# Altium PCB PCB.PcbDoc
Units mm, origin at the board's own origin, x right, y up, seen from the top; angles counter-clockwise.
Board outline 99.8 x 34.3 mm, 2 copper layers (Top Layer, Bottom Layer), stack 1.571 mm thick; 57 components, 80 nets, 265 pads, 69 vias.
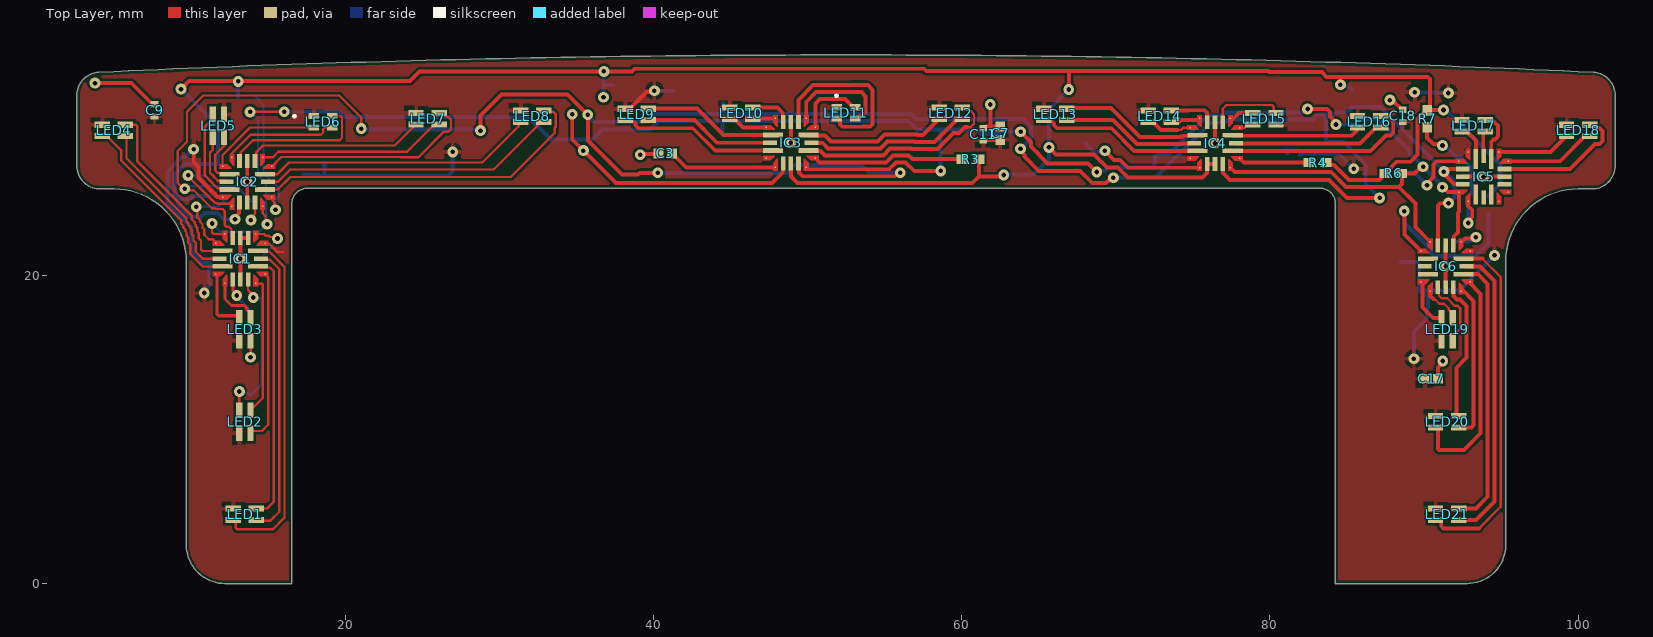
[diagram p0: Top Layer view]
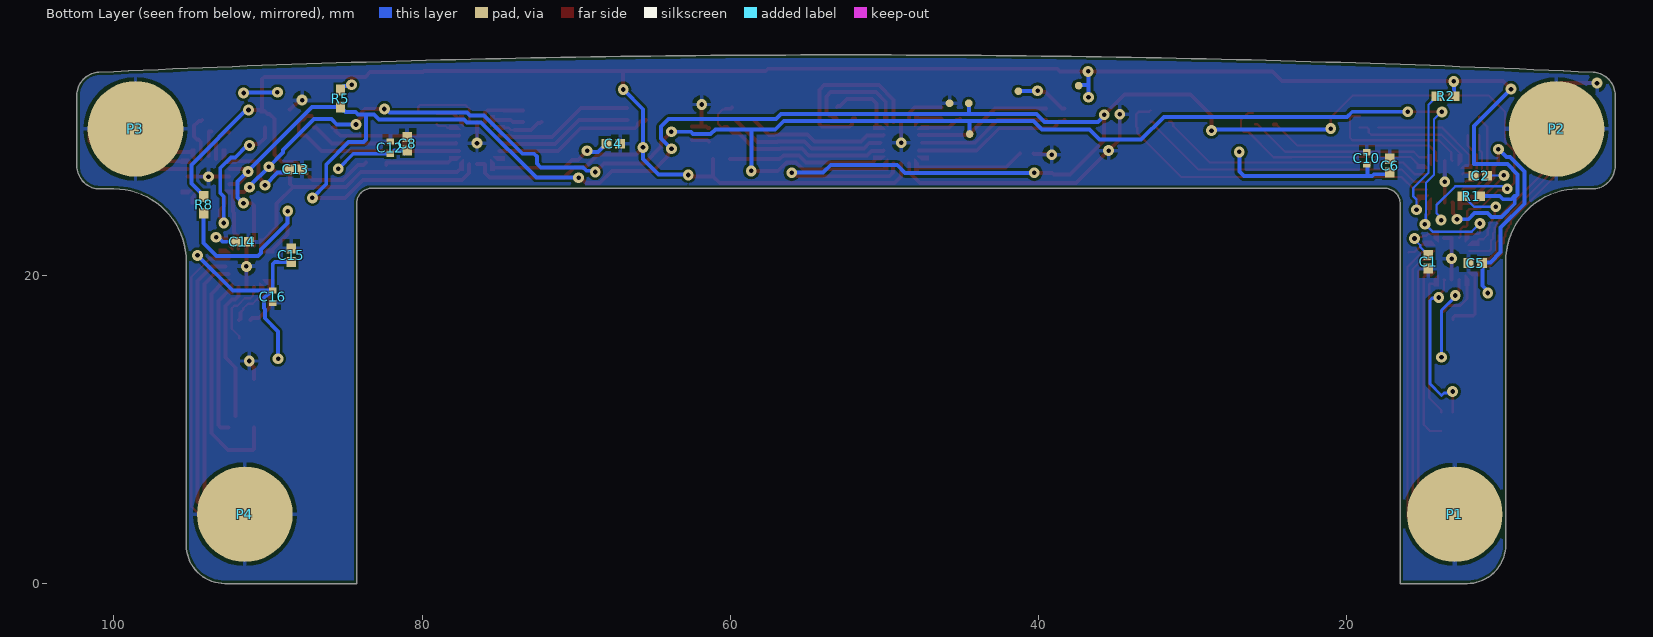
[diagram p1: Bottom Layer view, seen from below]
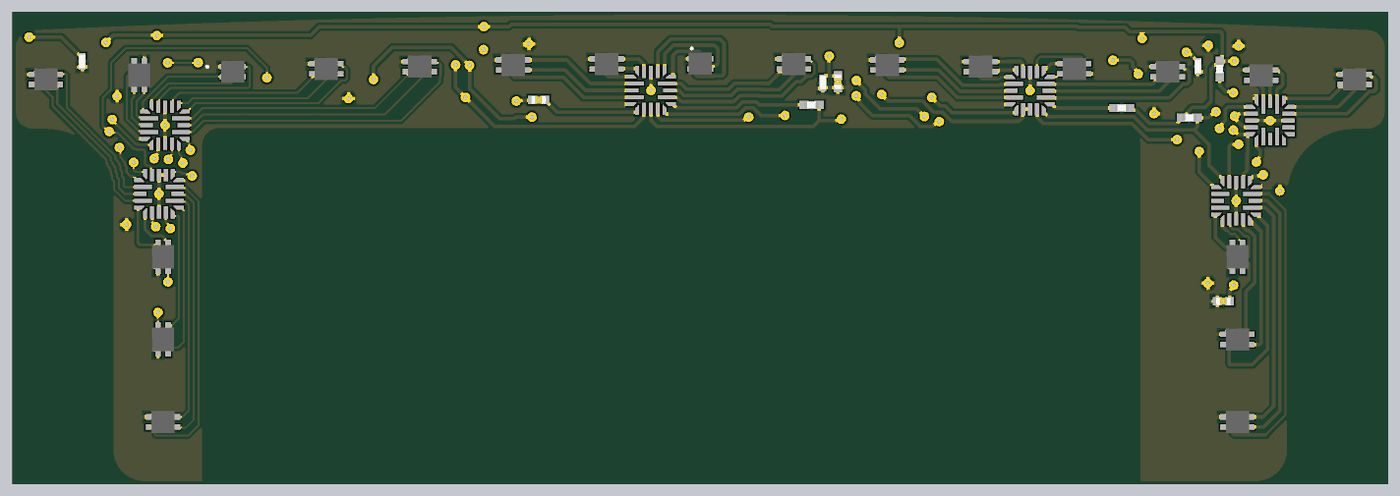
[diagram p2: 3D render of the assembled board from above, using the file's embedded part models]
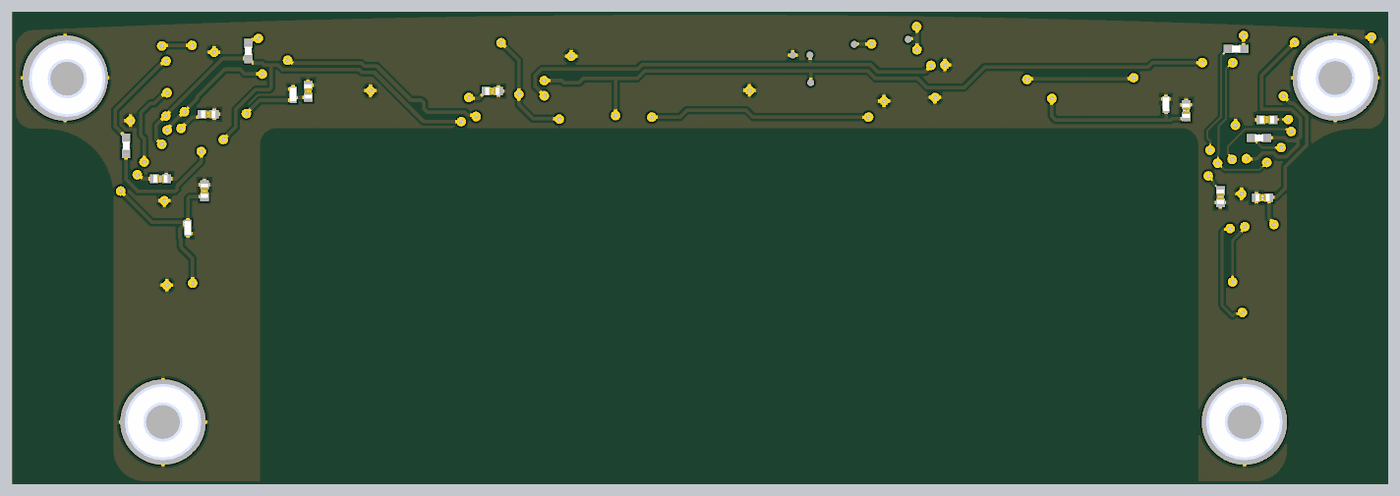
[diagram p3: 3D render of the assembled board from below, using the file's embedded part models]

## Layer stack, top to bottom
Top Solder: solder mask 0.0102, Solder Resist, Dk 3.5
Top Layer: signal copper 0.0356
Dielectric 1: dielectric 1.5, FR-4, Dk 4.8
Bottom Layer: signal copper 0.0356
Bottom Solder: solder mask 0.0102, Solder Resist, Dk 3.5

## Board outline
4.1,25.602 cw(c4.1,27.102) 2.6,27.102 2.6,31.68 cw(c4.1,31.68) 4.03,33.178 4.989,33.222 5.948,33.266 6.908,33.308 7.869,33.35 8.83,33.391 9.792,33.431 10.754,33.47 11.717,33.508 12.68,33.545 13.644,33.581 14.609,33.617 15.574,33.651 16.539,33.685 17.505,33.718 18.472,33.75 19.439,33.781 20.406,33.811 21.374,33.84 22.343,33.868 23.311,33.896 24.281,33.922 25.25,33.948 26.22,33.972 27.19,33.996 28.161,34.019 29.132,34.041 30.103,34.062 31.075,34.083 32.047,34.102 33.019,34.12 33.991,34.138 34.964,34.155 35.937,34.17 36.91,34.185 37.883,34.199 38.857,34.212 39.831,34.224 40.805,34.236 41.779,34.246 42.753,34.255 43.727,34.264 44.702,34.272 45.676,34.278 46.651,34.284 47.626,34.289 48.601,34.293 49.575,34.296 50.55,34.299 51.525,34.3 52.5,34.3 53.475,34.3 54.45,34.299 55.425,34.296 56.4,34.293 57.375,34.289 58.35,34.284 59.324,34.278 60.299,34.272 61.273,34.264 62.248,34.255 63.222,34.246 64.196,34.236 65.17,34.224 66.144,34.212 67.117,34.199 68.091,34.185 69.064,34.17 70.037,34.155 71.01,34.138 71.982,34.12 72.954,34.102 73.926,34.083 74.898,34.062 75.869,34.041 76.84,34.019 77.81,33.996 78.781,33.972 79.751,33.948 80.72,33.922 81.689,33.896 82.658,33.868 83.626,33.84 84.594,33.811 85.562,33.781 86.529,33.75 87.495,33.718 88.461,33.685 89.427,33.651 90.392,33.617 91.356,33.581 92.321,33.545 93.284,33.508 94.247,33.47 95.209,33.431 96.171,33.391 97.132,33.35 98.093,33.308 99.052,33.266 100.012,33.222 100.97,33.178 cw(c100.9,31.68) 102.4,31.68 102.4,27.102 cw(c100.9,27.102) 100.9,25.602 100,25.602 ccw(c100,20.902) 95.3,20.902 95.3,2.5 cw(c92.8,2.5) 92.8,0 84.25,0 84.25,24.65 ccw(c83.25,24.65) 83.25,25.65 17.55,25.65 ccw(c17.55,24.65) 16.55,24.65 16.55,0 12.2,0 cw(c12.2,2.5) 9.7,2.5 9.7,20.902 ccw(c5,20.902) 5,25.602

## Design rules (kind name [scope] priority, off if disabled: settings)
BoardOutlineClearance [All] p1: gap=0.2 ignorepadtopadclearanceinfootprint=FALSE
Clearance [All] p1: gap=0.173 ignorepadtopadclearanceinfootprint=TRUE
MinimumSolderMaskSliver [All] p1: minsoldermaskwidth=0.1
PolygonConnect [All] p1: connectstyle=Relief reliefconductorwidth=0.254 reliefentries=4 polygonreliefangle="90 Angle" airgapwidth=0.254
RoutingVias [All] p1: holewidth=0.711 width=1.27 viastyle="Through Hole" minholewidth=0 minwidth=0 maxholewidth=0.711 maxwidth=1.27
SolderMaskExpansion [All] p1: expansion=0.102 istentingtop=FALSE
Width [All] p1: maxlimit=0.254 minlimit=0.15 preferedwidth=0.254
29 further rules are at their usual default settings.

## Classes and differential pairs
component class "Raspberry Pi inputs": P1 P2 P3 P4
component class LEDs_Sheet_2: C13 C14 C15 C16 C17 C18 IC6 LED17 LED18 LED19 LED20 LED21 R7 R8
component class LEDs_Sheet_1: C1 C2 C3 C4 C5 C6 C7 C8 C9 C10 C11 C12 IC1 IC2 IC3 IC4 LED1 LED2 LED3 LED4 LED5 LED6 LED7 LED8 LED9 LED10 LED11 LED12 LED13 LED14 LED15 LED16 R1 R2 R3 R4 R5 R6

## Components (designator, comment, footprint, x,y, rotation, side; value= is the part's Value field where it differs from the comment)
C1 "C0402C105K9PAC" CAPC1005X55N 14.733,20.875 r270 bottom
C2 "C0402C105K9PAC" CAPC1005X55N 11.362,26.465 r0 bottom
C3 "C0402C105K9PAC" CAPC1005X55N 40.773,27.905 r180 top
C4 "C0402C105K9PAC" CAPC1005X55N 67.59,28.549 r180 bottom
C5 "C0402C105K9PAC" CAPC1005X55N 11.683,20.798 r180 bottom
C6 "C0402C105K9PAC" CAPC1005X55N 17.226,27.122 r270 bottom
C7 "C0402C105K9PAC" CAPC1005X55N 62.499,29.227 r270 top
C8 "C0402C105K9PAC" CAPC1005X55N 80.96,28.53 r270 bottom
C9 "C1005X7S1A225K050BC" C1005_Commercial 7.636,30.699 r270 top
C10 "C1005X7S1A225K050BC" C1005_Commercial 18.706,27.582 r270 bottom
C11 "C1005X7S1A225K050BC" C1005_Commercial 61.397,29.145 r270 top
C12 "C1005X7S1A225K050BC" C1005_Commercial 82.062,28.288 r270 bottom
C13 "C0402C105K9PAC" CAPC1005X55N 88.212,26.865 r180 bottom
C14 "C0402C105K9PAC" CAPC1005X55N 91.683,22.177 r180 bottom
C15 "C0402C105K9PAC" CAPC1005X55N 88.492,21.305 r270 bottom
C16 "C1005X7S1A225K050BC" C1005_Commercial 89.694,18.608 r90 bottom
C17 "C0402C105K9PAC" CAPC1005X55N 90.482,13.281 r180 top
C18 "C1005X7S1A225K050BC" C1005_Commercial 88.619,30.347 r270 top
IC1 "LED1202JR" "QFN20 3x3 (0,5mm pitch)" 13.206,21.082 r0 top
IC2 "LED1202JR" "QFN20 3x3 (0,5mm pitch)" 13.654,26.066 r180 top
IC3 "LED1202JR" "QFN20 3x3 (0,5mm pitch)" 48.919,28.6 r180 top
IC4 "LED1202JR" "QFN20 3x3 (0,5mm pitch)" 76.442,28.58 r180 top
IC5 "LED1202JR" "QFN20 3x3 (0,5mm pitch)" 93.866,26.401 r90 top
IC6 "LED1202JR" "QFN20 3x3 (0,5mm pitch)" 91.404,20.578 r0 top
LED1 "150161M153130" 150161M153130#1 13.5,4.5 r0 top
LED2 "150161M153130" 150161M153130#1 13.5,10.5 r90 top
LED3 "150161M153130" 150161M153130#1 13.5,16.5 r90 top
LED4 "150161M153130" 150161M153130#1 5,29.402 r0 top
LED5 "150161M153130" 150161M153130#1 11.782,29.702 r270 top
LED6 "150161M153130" 150161M153130#2 18.565,29.956 r0 top
LED7 "150161M153130" 150161M153130#1 25.35,30.164 r0 top
LED8 "150161M153130" 150161M153130#1 32.137,30.326 r0 top
LED9 "150161M153130" 150161M153130#1 38.924,30.441 r0 top
LED10 "150161M153130" 150161M153130#1 45.712,30.511 r0 top
LED11 "150161M153130" 150161M153130#2 52.5,30.534 r0 top
LED12 "150161M153130" 150161M153130#1 59.288,30.511 r0 top
LED13 "150161M153130" 150161M153130#1 66.076,30.441 r0 top
LED14 "150161M153130" 150161M153130#1 72.863,30.326 r0 top
LED15 "150161M153130" 150161M153130#1 79.65,30.164 r180 top
LED16 "150161M153130" 150161M153130#1 86.435,29.956 r0 top
LED17 "150161M153130" 150161M153130#1 93.218,29.702 r0 top
LED18 "150161M153130" 150161M153130#1 100,29.402 r0 top
LED19 "150161M153130" 150161M153130#1 91.5,16.5 r90 top
LED20 "150161M153130" 150161M153130#1 91.5,10.5 r0 top
LED21 "150161M153130" 150161M153130#1 91.5,4.5 r0 top
P1 "SMTSOB-M3-6ET" SMTSOB-M3-6ET#1 13,4.5 r90 bottom
P2 "SMTSOB-M3-6ET" SMTSOB-M3-6ET#1 6.4,29.5 r90 bottom
P3 "SMTSOB-M3-6ET" SMTSOB-M3-6ET#2 98.451,29.449 r90 bottom
P4 "SMTSOB-M3-6ET" SMTSOB-M3-6ET#1 91.5,4.5 r90 bottom
R1 "MCS04020D1001BE000" RESC1005X37N 11.937,25.137 r180 bottom
R2 "MCS04020D1001BE000" RESC1005X37N 13.602,31.614 r180 bottom
R3 "MCS04020D1001BE000" RESC1005X37N 60.574,27.538 r0 top
R4 "MCS04020D1001BE000" RESC1005X37N 83.094,27.318 r0 top
R5 "MCS04020D1001BE000" RESC1005X37N 85.304,31.469 r90 bottom
R6 "MCS04020D1001BE000" RESC1005X37N 88.011,26.609 r180 top
R7 "MCS04020D1001BE000" RESC1005X37N 90.209,30.152 r90 top
R8 "MCS04020D1001BE000" RESC1005X37N 94.178,24.572 r90 bottom

## Footprints (in the part's own frame and the unit in brackets; to place one, negate y for a bottom-side part, rotate by r counter-clockwise, add the part's x,y. Pads: shape width x height; smd on the part's side, far side on the other; paste and mask are expansions set on the pad)
150161M153130#1 [mm]
  rect 1x0.4 smd: 1(-0.75,0.37) 2(-0.75,-0.37) 3(0.75,-0.37) 4(0.75,0.37)
  body extent -0.85,-0.8 0.85,0.8, height 1.8
150161M153130#2 [mm]
  rect 0.7x0.4 smd: 1(-0.6,0.37) 2(-0.6,-0.37) 3(0.6,-0.37) 4(0.6,0.37)
  silkscreen extent -1.9,0.32 -1.8,0.42, body extent -0.85,-0.8 0.85,0.8, height 1.8
C1005_Commercial [mm]
  rect 0.4x0.5 smd: 1(-0.4,0) 2(0.4,0)
  body extent -0.51,-0.25 0.49,0.25, height 0.25
CAPC1005X55N [mm]
  rect 0.65x0.62 smd: 1(-0.44,0) 2(0.44,0)
  body extent -0.52,-0.28 0.53,0.27, height 0.55
"QFN20 3x3 (0,5mm pitch)" [mm]
  round 0.1 smd: 1(-1.6,1) 5(-1.6,-1) 6(-1,-1.6) 10(1,-1.6) 11(1.6,-1) 15(1.6,1) 16(1,1.6) 20(-1,1.6)
  rect 1.3x0.3 smd: 2(-1.15,0.5) 4(-1.15,-0.5) 12(1.15,-0.5) 14(1.15,0.5)
  rect 0.9x0.3 smd: 3(-1.35,0) 13(1.35,0)
  rect 0.3x0.9 smd: 7(-0.5,-1.35) 8(0,-1.35) 9(0.5,-1.35) 17(0.5,1.35) 18(0,1.35) 19(-0.5,1.35)
  Top Layer region: 1.15,-1.8 1.15,-1.29 0.91,-1.05 0.85,-1.05 0.85,-1.8
  Top Layer region: 1.8,-1.15 1.29,-1.15 1.05,-0.91 1.05,-0.85 1.8,-0.85
  Top Layer region: 1.8,1.15 1.29,1.15 1.05,0.91 1.05,0.85 1.8,0.85
  Top Layer region: 1.15,1.8 1.15,1.29 0.91,1.05 0.85,1.05 0.85,1.8
  Top Layer region: -1.15,1.8 -1.15,1.29 -0.91,1.05 -0.85,1.05 -0.85,1.8
  Top Layer region: -1.8,1.15 -1.29,1.15 -1.05,0.91 -1.05,0.85 -1.8,0.85
  Top Layer region: -1.8,-1.15 -1.29,-1.15 -1.05,-0.91 -1.05,-0.85 -1.8,-0.85
  Top Layer region: -1.15,-1.8 -1.15,-1.29 -0.91,-1.05 -0.85,-1.05 -0.85,-1.8
  body extent -1.5,-1.5 1.5,1.5, height 0.55
RESC1005X37N [mm]
  rect 0.7x0.6 smd: 1(-0.55,0) 2(0.55,0)
  body extent -0.5,-0.25 0.5,0.25, height 0.32
SMTSOB-M3-6ET#1 [mm] "Distance M3"
  round 6.2 smd: 1(0,0)
  body extent -2.78,-2.78 2.78,2.78, height 6
SMTSOB-M3-6ET#2 [mm] "Distance M3"
  round 6.2 smd: 1(0.051,0.149)
  body extent -2.78,-2.78 2.78,2.78, height 6

## Part data
C1 C2 C3 C4 C5 C6 C7 C8 C13 C14 C15 C17: "Capacitor", Manufacturer_Name=KEMET, Mouser Part Number=80-C0402C105K9PAC, Arrow Part Number=C0402C105K9PAC, Arrow Price/Stock=https://www.arrow.com/en/products/c0402c105k9pac/kemet-corporation?region=nac, Datasheet Link=https://content.kemet.com/datasheets/KEM_C1002_X7R_SMD.pdf, Height=0.55mm, Manufacturer_Part_Number=C0402C105K9PAC, Mouser Price/Stock=https://www.mouser.co.uk/ProductDetail/KEMET/C0402C105K9PAC?qs=AHS6Mz2dKxPyNrxaU50ZkQ%3D%3D
C9 C10 C11 C12 C16 C18: "2µ2F 0402", Manufacturer_Name=TDK, Mouser Part Number=810-C1005X7S1A225K, Arrow Part Number=C1005X7S1A225K050BC, Arrow Price/Stock=https://www.arrow.com/en/products/c1005x7s1a225k050bc/tdk?region=nac, Datasheet Link=https://product.tdk.com/system/files/dam/doc/product/capacitor/ceramic/mlcc/catalog/mlcc_commercial_general_en.pdf, Height=0.55mm, Manufacturer_Part_Number=C1005X7S1A225K050BC, Mouser Price/Stock=https://www.mouser.co.uk/ProductDetail/TDK/C1005X7S1A225K050BC?qs=dfay7wIA1uFANmjMJAzwOA%3D%3D
IC1 IC2 IC3 IC4 IC5 IC6: "Integrated Circuit", Manufacturer_Name=STMicroelectronics, Mouser Part Number=511-LED1202JR, Arrow Part Number=LED1202JR, Arrow Price/Stock=https://www.arrow.com/en/products/led1202jr/stmicroelectronics?region=nac, Datasheet Link=https://componentsearchengine.com/Datasheets/1/LED1202JR.pdf, Height=0.653mm, Manufacturer_Part_Number=LED1202JR, Mouser Price/Stock=https://www.mouser.co.uk/ProductDetail/STMicroelectronics/LED1202JR?qs=P19jvy6W2mcPsIm9dkDZbQ%3D%3D
LED1 LED2 LED3 LED4 LED5 LED6 LED7 LED8 LED9 LED10 LED11 LED12 LED13 LED14 LED15 LED16 LED17 LED18 LED19 LED20 LED21: "LED", Manufacturer_Name="Wurth Elektronik", Mouser Part Number=710-150161M153130, Datasheet Link=https://www.mouser.co.uk/datasheet/2/445/150161M153130-1838821.pdf, Height=1.7mm, Manufacturer_Part_Number=150161M153130, Mouser Price/Stock=https://www.mouser.co.uk/ProductDetail/Wurth-Elektronik/150161M153130?qs=GedFDFLaBXEcD4evLrps3w%3D%3D
P1 P2 P3 P4: "Spacer 8mm"
R1 R2 R3 R4 R5 R6 R7 R8: "Resistor 1k 0402", Manufacturer_Name=Vishay, Mouser Part Number=594-MCS04020D1001BE0, Datasheet Link=http://www.vishay.com/docs/28705/mcx0x0xpro.pdf, Height=0.37mm, Manufacturer_Part_Number=MCS04020D1001BE000, Mouser Price/Stock=https://www.mouser.co.uk/ProductDetail/Vishay-Beyschlag/MCS04020D1001BE000?qs=H5EaGE3Pc5m43MFwYZQH1Q%3D%3D

## Free pads (board coordinates)
  round 0.5 smd far side: 2(44.477,29.164) 3(44.539,31.165) 4(45.782,31.165) 5(37.407,32.306) 6(41.317,31.948)

## Via types
v1: diameter 0.7, hole 0.3, Top Layer to Bottom Layer, 69 vias

## Nets (pads, with @x,y where several pads share a name; then routed paths per layer and width w, separated by ;. In a path a pad name is that pad's centre, name@x,y a point inside that pad or via, vN(x,y) a via of type N, cw(c..) or ccw(c..) an arc to the next point about the centre after c; other vN are vias at no path point)
1B: IC1.12 LED1.4 | length 17.6
  Top Layer w0.15: LED1.4@14.1,4.87 14.935,4.87 15.381,5.316 15.381,20.259 15.133,20.507 14.431,20.507 IC1.12
1G: IC1.13 LED1.3 | length 19.1
  Top Layer w0.15: LED1.3@14.1,4.13 14.145,4.085 15.156,4.085 15.728,4.657 15.728,20.403 15.124,21.007 14.631,21.007 IC1.13
1R: IC1.14 LED1.2 | length 22.5
  Top Layer w0.15: LED1.2@12.9,4.13 12.9,3.611 12.988,3.523 15.32,3.523 16.075,4.279 16.075,20.546 15.293,21.329 15.116,21.507 14.431,21.507 IC1.14
2B: IC1.9 LED2.4 | length 10.7
  Top Layer w0.15: LED2.4@13.13,11.1 13.137,11.107 13.137,12.458 v1(13.143,12.464) ; IC1.9 13.706,19.042 14.037,18.711 v1(14.037,18.562)
  Top Layer w0.2: IC1.9@13.656,19.682 IC1.9
  Bottom Layer w0.2: v1(13.143,12.464) 13.239,12.369 13.699,12.369 13.86,12.207 14.612,12.959 14.612,18.362 14.465,18.51 14.09,18.51 v1(14.037,18.562)
2G: IC1.10 LED2.3 | length 9.1
  Top Layer w0.15: LED2.3@13.87,11.1 LED2.3 14.659,12.039 14.659,19.426 14.628,19.458 14.23,19.458 IC1.10
2R: IC1.11 LED2.2 | length 11.2
  Top Layer w0.15: LED2.2@13.87,9.9 14.608,9.9 15.006,10.299 15.006,19.881 IC1.11
3B: IC1.5 LED3.4 | length 4.3
  Top Layer w0.2: IC1.5 11.684,20.004 11.684,17.492 11.801,17.375 13.005,17.375 LED3.4 LED3.4@13.13,17.1
3G: IC1.6 LED3.3 | length 3.4
  Top Layer w0.2: IC1.6 12.206,18.464 12.632,18.038 12.798,18.038 12.807,18.047 13.453,18.047 13.627,17.873 13.627,17.767 13.744,17.65 13.77,17.65 13.87,17.55 LED3.3
3R: IC1.7 LED3.2 | length 6.7
  Top Layer w0.15: v1(13.861,14.683) 13.87,14.692 LED3.2@13.87,15.9
  Top Layer w0.2: IC1.7 12.738,19.7 12.738,18.982 12.975,18.745 v1(12.975,18.694)
  Bottom Layer w0.2: v1(12.975,18.694) 12.975,18.61 13.861,17.724 v1(13.861,14.683)
3V3: IC2.17 IC3.18 IC4.17 IC4.18 pad.5 R1.2 R2.2 R3.2 R4.2 R5.2 R6.2 R7.2 R8.2 | length 165.3
  Top Layer w0.25: v1(12.862,23.636) 12.862,23.758 13.129,24.024 13.129,24.691 IC2.17
  Top Layer w0.254: v1(9.357,32.082) 9.876,32.6 24.21,32.6 24.841,33.232 v1(36.791,33.232) 38.604,33.232 38.776,33.404 57.576,33.404 57.727,33.253 66.966,33.253 ; v1@36.681,31.469 v1(36.766,31.554) ; IC3.18 48.919,26.411 49.353,25.977 60.692,25.977 61.124,26.409 ; R3.2 61.124,26.409 ; v1(62.739,26.508) 62.64,26.409 61.124,26.409 ; v1(65.667,28.298) 66.138,27.827 68.601,27.827 69.421,27.007 70.13,27.007 70.784,26.353 75.623,26.353 75.919,26.649 75.919,27.207 IC4.17 IC4.18 ; v1(66.949,32.057) 66.966,32.074 66.966,33.253 ; R4.2 83.817,27.145 84.17,27.145 85.136,26.179 87.125,26.179 R6.2@87.314,26.368 ; v1(84.576,32.37) 84.539,32.407 84.539,32.877 ; R6.2 87.511,26.609 87.884,26.982 87.884,27.045 88.207,27.367 89.125,27.367 89.585,27.827 89.585,30.158 89.906,30.479 90.036,30.479 90.186,30.629 R7.2@90.186,30.643 ; R7.2@90.317,30.627 R7.2@90.403,30.713 ; R7.2@90.317,30.648 R7.2@90.447,30.648 ; R7.2@90.32,30.713 v1@91.258,30.713 ; R7.2@90.371,30.64 R7.2@90.421,30.69 ; R7.2@90.39,30.667 90.39,32.728 90.242,32.877 84.539,32.877 ; R7.2@90.438,30.713 v1@91.258,30.713 ; R7.2@90.446,30.615 R7.2@90.446,30.665 ; v1(91.269,30.724) v1@91.258,30.713 ; 66.966,33.253 79.87,33.253 79.944,33.179 83.372,33.179 83.674,32.877 84.539,32.877
  Bottom Layer w0.25: R1.2@11.134,25.143 10.085,25.143 9.88,24.938 9.323,24.938 9.118,25.143 9.027,25.143 ; 11.759,27.215 9.592,27.215 8.929,26.552 8.929,25.241 9.027,25.143 ; v1@12.862,23.514 v1(12.862,23.636) 12.115,23.636 11.717,24.034 10.875,24.034 10.617,23.775 9.976,23.775 9.11,24.64 9.11,25.06 9.027,25.143
  Bottom Layer w0.254: v1(9.357,32.082) 11.759,29.68 11.759,27.215 ; R2.2 13.06,31.622 13.06,32.574 v1(13.068,32.582) ; v1(36.766,31.554) 36.778,31.567 36.778,32.393 ; v1(36.791,33.232) 36.778,33.22 36.778,32.393 ; pad.5 37.36,32.353 36.819,32.353 36.778,32.393 ; v1(62.739,26.508) 62.779,26.548 64.657,26.548 65.667,27.558 65.667,30.775 v1(66.949,32.057) ; v1(84.576,32.37) 84.661,32.285 85.039,32.285 85.081,32.242 85.131,32.242 85.304,32.069 R5.2 ; v1@91.426,30.714 94.973,27.167 94.973,25.967 94.178,25.172 R8.2
4B: IC1.2 LED4.4 | length 12.1
  Top Layer w0.15: LED4.4@5.6,29.772 6.437,29.772 6.525,29.684 6.525,27.381 10.059,23.846 10.059,23.627 10.238,23.449 10.238,23.34 10.32,23.257 10.32,23.168 10.402,23.086 10.402,22.96 10.42,22.942 10.42,22.814 10.513,22.722 10.513,22.394 10.652,22.255 10.652,21.67 10.739,21.582 IC1.2
4G: IC1.3 LED4.3 | length 11
  Top Layer w0.15: LED4.3@5.823,28.959 5.823,27.592 9.712,23.702 9.712,23.483 9.843,23.353 9.843,23.244 9.973,23.113 9.973,23.024 10.055,22.942 10.055,22.816 10.073,22.798 10.073,22.671 10.166,22.578 10.166,22.251 10.305,22.112 10.305,21.526 10.749,21.082 IC1.3
4R: IC1.4 LED4.2 | length 12.2
  Top Layer w0.15: LED4.2@4.623,28.959 5.476,28.106 5.476,27.448 9.365,23.559 9.365,23.339 9.496,23.209 9.496,23.1 9.626,22.97 9.626,22.88 9.708,22.799 9.708,22.673 9.726,22.654 9.726,22.527 9.819,22.434 9.819,22.107 9.958,21.968 9.958,21.383 10.765,20.576 12.05,20.576 IC1.4
5B: IC2.12 LED5.4 | length 3.6
  Top Layer w0.15: LED5.4@12.152,29.102 12.152,28.39 11.582,27.82 11.582,26.804 11.744,26.641 12.428,26.641 IC2.12
5G: IC2.13 LED5.3 | length 3.8
  Top Layer w0.15: LED5.3@11.412,29.102 11.412,28.141 11.235,27.963 11.235,26.968 11.235,26.66 11.489,26.405 11.489,26.396 11.744,26.141 12.229,26.141 IC2.13
5R: IC2.14 LED5.2 | length 6
  Top Layer w0.15: LED5.2@11.412,30.302 11.412,30.152 10.888,29.628 10.888,26.825 10.888,26.516 11.142,26.262 11.142,26.243 11.744,25.641 12.429,25.641 IC2.14
6B: IC2.9 LED6.4 | length 9.5
  Top Layer w0.15: IC2.9 13.229,27.491 13.229,27.976 14.02,28.767 19.647,28.767 19.8,28.92 19.8,30.238 19.712,30.326 LED6.4
6G: IC2.10 LED6.3 | length 7.6
  Top Layer w0.15: IC2.10 12.654,27.901 13.867,29.114 18.428,29.114 18.587,29.273 18.587,29.498 18.675,29.586 LED6.3
6R: IC2.11 LED6.2 | length 7.4
  Top Layer w0.15: IC2.11 12.045,27.075 12.045,27.792 13.839,29.586 LED6.2
7B: IC2.5 LED7.4 | length 14.2
  Top Layer w0.15: IC2.5 15.857,27.67 23.582,27.67 23.588,27.664 24.763,27.664 26.421,29.322 26.713,29.322 26.872,29.481 26.872,30.107 26.713,30.266 26.613,30.266 26.525,30.354 26.525,30.409 26.4,30.534 LED7.4
7G: IC2.6 LED7.3 | length 12.2
  Top Layer w0.15: IC2.6 15.317,27.666 15.668,28.017 24.023,28.017 25.8,29.794 LED7.3@25.95,29.794
7R: IC2.7 LED7.2 | length 11.9
  Top Layer w0.15: IC2.7 14.229,27.491 14.229,27.976 14.673,28.42 23.226,28.42 LED7.2
  Top Layer w0.254: LED7.2 LED7.2@24.75,29.794
8B: IC2.2 LED8.4 | length 22.6
  Top Layer w0.15: IC2.2 15.636,25.566 16.453,26.383 30.752,26.383 33.605,29.237 33.605,29.589 33.659,29.643 33.659,30.466 33.517,30.608 32.825,30.608 LED8.4@32.737,30.696
8G: IC2.3 LED8.3 | length 19.4
  Top Layer w0.15: IC2.3 15.645,26.066 16.444,26.865 29.646,26.865 32.462,29.681 32.462,29.831 32.587,29.956 LED8.3@32.737,29.956
8R: IC2.4 LED8.2 | length 18.2
  Top Layer w0.15: IC2.4 15.617,26.566 16.368,27.317 28.898,27.317 31.262,29.681 31.262,29.831 LED8.2 LED8.2@31.537,29.956
9B: IC3.12 LED9.4 | length 9
  Top Layer w0.254: LED9.4@39.524,30.811 42.83,30.811 44.541,29.1 IC3.12
9G: IC3.13 LED9.3 | length 8.7
  Top Layer w0.254: LED9.3@39.524,30.071 42.672,30.071 44.143,28.6 IC3.13
9R: IC3.14 LED9.2 | length 10.3
  Top Layer w0.254: LED9.2@38.324,30.071 38.397,29.998 38.698,29.998 38.847,29.849 38.847,29.736 39.039,29.544 42.557,29.544 44.015,28.086 47.756,28.086 IC3.14
10B: IC3.9 LED10.4 | length 2.5
  Top Layer w0.254: LED10.4@46.312,30.881 48.047,30.881 48.396,30.531 48.396,30.273 IC3.9@48.423,30.246
10G: IC3.10 LED10.3 | length 1.6
  Top Layer w0.254: LED10.3@46.312,30.141 46.349,30.178 47.897,30.178 IC3.10
10R: IC3.11 LED10.2 | length 2.4
  Top Layer w0.254: LED10.2@45.112,30.141 45.185,30.068 45.335,30.068 45.806,29.597 47.316,29.597 IC3.11
11B: IC3.5 LED11.4 | length 4.5
  Top Layer w0.254: IC3.5 50.519,31.143 50.807,31.431 52.423,31.431 52.877,30.977 53.027,30.977 LED11.4
11G: IC3.6 LED11.3 | length 7.2
  Top Layer w0.254: IC3.6 49.919,31.249 50.556,31.885 52.573,31.885 ; 52.574,31.885 53.497,31.885 53.777,31.604 53.777,30.569 53.585,30.377 53.463,30.377 53.323,30.237 53.173,30.237 LED11.3
11R: IC3.7 LED11.2 | length 11.8
  Top Layer w0.254: IC3.7 49.419,31.387 50.372,32.339 52.762,32.339 53.926,32.339 54.231,32.034 54.231,29.8 54.076,29.645 53.594,29.645 53.585,29.637 52.268,29.637 52.111,29.794 52.111,30.091 52.038,30.164 LED11.2
12B: IC3.2 LED12.4 | length 13.4
  Top Layer w0.15: 60.373,29.614 60.596,29.614 60.81,29.828 60.81,30.454 60.509,30.755 LED12.4@60.373,30.755
  Top Layer w0.254: IC3.2 50.092,28.077 50.851,28.077 51.146,27.781 54.922,27.781 55.368,28.227 56.747,28.227 56.776,28.198 58.437,28.198 59.468,29.229 59.828,29.229 60.213,29.614 60.373,29.614 ; LED12.4@59.888,30.881 59.961,30.808 LED12.4@60.32,30.808
12G: IC3.3 LED12.3 | length 10.6
  Top Layer w0.254: IC3.3 50.292,28.577 50.713,28.577 50.716,28.574 50.992,28.574 51.333,28.232 54.735,28.232 55.181,28.678 56.934,28.678 56.963,28.649 58.246,28.649 59.738,30.141 LED12.3@59.888,30.141
12R: IC3.4 LED12.2 | length 9.4
  Top Layer w0.254: IC3.4 50.092,29.077 50.713,29.077 50.716,29.074 51.129,29.074 51.52,28.683 54.548,28.683 54.994,29.129 57.12,29.129 57.15,29.1 57.497,29.1 LED12.2 LED12.2@58.688,30.141
13B: IC4.12 LED13.4 | length 9.1
  Top Layer w0.254: LED13.4@66.722,30.857 69.687,30.857 71.565,28.979 74.134,28.979 74.136,28.981 74.204,28.981 74.232,29.008 74.38,29.008 74.429,29.057 74.98,29.057 IC4.12@75,29.077
13G: IC4.13 LED13.3 | length 8.8
  Top Layer w0.254: LED13.3@66.676,30.071 69.835,30.071 71.378,28.528 74.331,28.528 74.361,28.557 74.78,28.557 IC4.13@74.8,28.577
13R: IC4.14 LED13.2 | length 10.4
  Top Layer w0.254: LED13.2@65.476,30.071 65.549,29.998 65.85,29.998 65.999,29.849 65.999,29.736 66.191,29.544 69.724,29.544 71.191,28.077 IC4.14@75,28.077
14B: IC4.9 LED14.4 | length 3.2
  Top Layer w0.254: LED14.4@73.463,30.696 74.73,30.696 74.742,30.707 75.771,30.707 75.919,30.559 75.919,29.953 IC4.9
14G: IC4.10 LED14.3 | length 2.1
  Top Layer w0.254: LED14.3@73.463,29.956 74.121,29.956 74.254,30.089 75.361,30.089 75.435,30.015
14R: IC4.11 LED14.2 | length 3
  Top Layer w0.15: 74.017,29.432 74.239,29.432 74.374,29.567 74.842,29.567 74.965,29.567
  Top Layer w0.254: LED14.2@72.263,29.956 72.336,29.883 72.486,29.883 72.937,29.432 74.017,29.432
15B: IC4.5 LED15.4 | length 1.1
  Top Layer w0.15: IC4.5 78.364,29.58 78.475,29.691 78.947,29.691 LED15.4@79.05,29.794
15G: IC4.6 LED15.3 | length 1.8
  Top Layer w0.15: 77.497,30.1 77.497,30.18
  Top Layer w0.254: 77.497,30.1 77.523,30.125 77.592,30.125 78.001,30.534 LED15.3@79.05,30.534
15R: IC4.7 LED15.2 | length 4.8
  Top Layer w0.15: IC4.7@76.881,29.992 IC4.7 76.942,30.809 77.182,31.048 80.145,31.048 80.192,31.001 80.25,30.943 LED15.2@80.25,30.534
16B: IC4.2 LED16.4 | length 12.6
  Top Layer w0.254: IC4.2 77.616,28.057 86.519,28.057 87.523,29.062 87.819,29.062 88.009,29.252 88.009,29.92 87.819,30.11 87.701,30.11 87.485,30.326 LED16.4
16G: IC4.3 LED16.3 | length 9.7
  Top Layer w0.254: IC4.3 77.815,28.557 85.856,28.557 86.885,29.586 LED16.3@87.035,29.586
16R: IC4.4 LED16.2 | length 8.6
  Top Layer w0.254: IC4.4 77.615,29.057 85.306,29.057 85.612,29.363 85.612,29.513 LED16.2 LED16.2@85.835,29.586
17B: IC5.12 LED17.4 | length 3.1
  Top Layer w0.254: LED17.4@94.268,30.072 94.341,29.999 94.485,29.999 94.49,29.994 94.505,29.994 94.643,29.856 94.792,29.707 94.792,28.998 94.602,28.808 94.515,28.808 94.367,28.659 IC5.12
17G: IC5.13 LED17.3 | length 1.8
  Top Layer w0.254: LED17.3@93.668,29.332 93.818,29.332 93.843,29.307 93.843,27.774 IC5.13
17R: IC5.14 LED17.2 | length 2.3
  Top Layer w0.254: LED17.2@92.545,29.259 92.618,29.332 92.768,29.332 93.366,28.734 IC5.14
18B: IC5.9 LED18.4 | length 8.8
  Top Layer w0.254: IC5.9 99.482,26.901 101.088,28.508 101.384,28.508 101.574,28.698 101.574,29.366 101.384,29.556 101.266,29.556 101.05,29.772 LED18.4
18G: IC5.10 LED18.3 | length 5.8
  Top Layer w0.254: IC5.10 98.819,27.401 100.45,29.032 LED18.3@100.6,29.032
18R: IC5.11 LED18.2 | length 5
  Top Layer w0.254: IC5.11 98.219,28.001 LED18.2 LED18.2@99.4,29.032
19B: IC6.5 LED19.4 | length 3.3
  Top Layer w0.254: 90.016,19.601 89.896,19.481 89.896,17.928 90.13,17.694 90.605,17.219 91.057,17.219 91.13,17.146 LED19.4@91.13,17.1
19G: IC6.6 LED19.3 | length 2.7
  Top Layer w0.15: 90.629,18.454 90.703,18.454 90.998,18.159 91.305,18.159 91.602,17.863 91.602,17.763 91.69,17.675 91.745,17.675 91.792,17.628 LED19.3@91.792,17.548
  Top Layer w0.254: IC6.6 90.404,18.67 90.62,18.454 90.629,18.454 ; LED19.3@91.792,17.548 91.792,17.472 91.797,17.467 91.797,17.173 LED19.3@91.87,17.1
19R: IC6.7 LED19.2 | length 4.5
  Top Layer w0.15: IC6.7@90.927,18.912 90.979,18.86 90.979,18.669 91.142,18.506 91.504,18.506 91.988,18.022 92.183,18.022 92.352,17.853 92.352,16.532 91.87,16.05 LED19.2@91.87,15.9
  Top Layer w0.254: IC6.7 90.927,19.205 IC6.7@90.927,18.912
20B: IC6.9 LED20.4 | length 9.1
  Top Layer w0.254: IC6.9 91.927,19.205 91.927,18.647 92.154,18.421 92.348,18.421 92.751,18.018 92.751,14.656 92.1,14.005 LED20.4@92.1,10.87
20G: IC6.10 LED20.3 | length 9.9
  Top Layer w0.254: 92.412,19.144 92.491,19.065 93.225,18.331 93.225,10.279 93.076,10.13 LED20.3@92.55,10.13
20R: IC6.11 LED20.2 | length 14.8
  Top Layer w0.254: LED20.2@90.9,10.13 90.9,8.724 90.959,8.664 92.589,8.664 93.676,9.752 93.676,18.798 92.882,19.592
21B: IC6.12 LED21.4 | length 18
  Top Layer w0.254: LED21.4@92.1,4.87 93.364,4.87 94.127,5.633 94.127,19.44 93.489,20.078 IC6.12
21G: IC6.13 LED21.3 | length 19.5
  Top Layer w0.254: LED21.3@92.1,4.13 93.377,4.13 94.578,5.331 94.578,19.643 93.642,20.578 IC6.13
21R: IC6.14 LED21.2 | length 22.8
  Top Layer w0.15: 93.562,3.572 94.973,4.984 ; 93.784,21.078 94.977,19.886 94.977,4.991 94.973,4.987
  Top Layer w0.254: LED21.2@91.05,4.13 91.123,4.057 91.123,3.721 91.272,3.572 93.562,3.572 ; IC6.14 93.784,21.078
+5: C5.2 C6.2 C7.2 C8.2 C9.2 C10.2 C11.2 C12.2 C15.2 C16.2 C17.2 C18.2 IC1.15 IC2.15 IC3.15 IC4.15 IC5.15 IC6.15 LED1.1 LED2.1 LED3.1 LED4.1 LED5.1 LED6.1 LED7.1 LED8.1 LED9.1 LED10.1 LED11.1 LED12.1 LED13.1 LED14.1 LED15.1 LED16.1 LED17.1 LED18.1 LED19.1 LED20.1 LED21.1 pad.6 | length 55.4
  Top Layer w0.15: IC1.15 15.027,22.082 15.105,22.004 15.119,22.004 15.608,21.514 15.987,21.514 16,21.501
  Top Layer w0.254: v1(10.17,28.177) 10.184,28.163 10.184,27.319 10.489,27.014 10.489,26.351 10.743,26.096 10.743,26.068 11.719,25.092 12.028,25.092 IC2.15 ; LED9.1@38.324,30.811 38.474,30.811 39.555,31.892 39.984,31.892 v1(40.069,31.977) ; C11.2@61.397,28.668 61.517,28.787 C7.2 ; v1@89.277,14.659 v1(89.348,14.588)
  Bottom Layer w0.254: v1(10.17,28.177) 10.162,28.177 9.649,27.664 9.406,27.664 8.471,26.729 8.471,24.644 10.023,23.093 10.023,21.507 10.686,20.843 11.198,20.843 C5.2 ; v1(10.86,18.85) 10.86,18.971 11.214,19.324 11.214,20.798 C5.2@11.216,20.8 ; C6.2@17.268,26.556 18.254,26.556 18.377,26.433 18.674,26.433 ; C10.2@18.583,27.109 18.656,27.182 C10.2 18.674,27.15 18.674,26.433 ; v1(26.981,28.006) 26.981,26.726 26.689,26.433 18.674,26.433 ; v1(40.069,31.977) 40.084,31.963 41.302,31.963 pad.6 ; C8.2@81.143,27.907 C8.2 81.809,28.09 81.989,27.911 81.989,27.815 C12.2@81.939,27.815 ; C12.2 84.468,27.888 v1(85.446,26.909) ; C15.2 89.566,20.865 89.694,20.736 C16.2 92.292,19.008 v1(94.573,21.289) ; v1(89.348,14.588) 89.348,16.363 90.198,17.213 90.198,17.799 90.271,17.872 90.271,18.543 90.08,18.735 89.998,18.817 89.935,18.817 C16.2@89.783,18.969 ; v1(89.392,31.875) 89.415,31.852 91.561,31.852 v1(91.584,31.828)
GND: C1.2 C2.2 C3.2 C4.2 C5.1 C6.1 C7.1 C8.1 C9.1 C10.1 C11.1 C12.1 C13.2 C14.2 C15.1 C16.1 C17.1 C18.1 IC1.8 IC1.17 IC1.18 IC2.8 IC2.18 IC3.8 IC3.17 IC4.8 IC5.8 IC5.18 IC6.8 IC6.18 P1.1 P2.1 P3.1 P4.1 pad.4 | length 41.9
  Top Layer w0.254: v1(3.774,32.472) 6.127,32.472 7.5,31.099 C9.1 ; IC1.8 13.209,19.735 v1@13.209,21.05 ; v1@13.209,21.082 13.209,22.429 IC1.18 IC1.17 ; IC2.18 v1(13.654,26.066) IC2.8 ; v1(34.74,30.451) 34.74,28.812 v1(35.462,28.089) 37.574,25.977 47.705,25.977 48.396,26.669 48.396,27.227 IC3.17 ; v1(39.155,27.827) 39.194,27.866 40.295,27.866 C3.2 ; v1(48.921,28.6) IC3.8 ; C11.1 61.447,29.545 61.569,29.667 61.865,29.667 ; v1(61.865,31.083) 61.865,29.667 ; C7.1 61.865,29.667 ; v1(76.442,28.58) IC4.8 ; v1(87.789,31.37) 87.875,31.285 88.031,31.285 88.569,30.747 C18.1 ; C17.1 90.922,14.025 91.22,14.322 v1(91.22,14.443) ; IC6.8 v1(91.404,20.578) IC6.18 ; IC5.18 IC5.8
  other v1: 13.206,21.082 93.866,26.401
NetC1_1: C1.1 IC1.16 | length 3
  Top Layer w0.15: IC1.16 14.745,22.682 14.868,22.558 15.064,22.558 15.132,22.491 15.512,22.491 v1(15.617,22.385)
  Bottom Layer w0.15: C1.1 14.733,21.33 15.243,21.84 15.243,21.946 15.617,22.32 v1(15.617,22.385)
NetC2_1: C2.1 IC2.16 | length 5
  Top Layer w0.15: v1(9.815,26.481) 9.815,26.433 11.554,24.693 11.692,24.693 11.741,24.644 12.476,24.644 IC2.16
  Bottom Layer w0.15: v1@9.913,26.383 v1(9.815,26.481) 10.891,26.481 C2.1@10.907,26.465
  Bottom Layer w0.254: C2.1@10.907,26.465 C2.1
NetC3_1: C3.1 IC3.16 | length 7.1
  Top Layer w0.254: C3.1 41.228,27.905 42.133,27 IC3.16
NetC4_1: C4.1 IC4.16 | length 8.1
  Top Layer w0.254: v1(69.3,28.081) 69.893,27.488 70.287,27.488 70.795,26.98 IC4.16
  Bottom Layer w0.254: C4.1 68.045,28.549 68.587,28.007 69.226,28.007 v1(69.3,28.081)
NetC13_1: C13.1 IC5.16 | length 4.9
  Top Layer w0.254: v1(90.192,25.837) 90.192,25.958 90.617,26.383 90.617,27.203 90.816,27.401 IC5.16
  Bottom Layer w0.254: C13.1@88.939,26.658 89.374,26.658 90.192,25.839 v1(90.192,25.837)
NetC14_1: C14.1 IC6.16 | length 2.5
  Top Layer w0.254: IC6.16 92.449,22.178 92.655,22.385 93.283,22.385 v1(93.369,22.47)
  Bottom Layer w0.254: C14.1 92.956,22.177 93.248,22.47 v1(93.369,22.47) v1@93.306,22.533
NetIC1_1: IC1.1 R1.1 | length 5.5
  Top Layer w0.15: v1(10.338,24.447) 10.406,24.379 10.406,23.771 10.585,23.592 10.585,23.483 10.749,23.319 10.749,23.104 10.86,22.993 10.86,22.626 11.151,22.335 11.428,22.335 11.606,22.157 IC1.1
  Bottom Layer w0.15: v1(10.338,24.447) 11.747,24.447 12.437,25.137 R1.1
NetIC2_1: IC2.1 R2.1 | length 9
  Top Layer w0.15: IC2.1 15.254,24.901 15.413,24.741 15.413,24.327 v1(15.487,24.254)
  Bottom Layer w0.15: R2.1 14.202,31.614 14.427,31.389 14.427,31.345 14.705,31.066 14.705,26.654 15.704,25.655 15.704,25.137 15.487,24.92 v1(15.487,24.254)
NetIC3_1: IC3.1 R3.1 | length 9.9
  Top Layer w0.254: IC3.1 50.789,27.33 55.109,27.33 55.555,27.776 56.564,27.776 56.802,27.538 R3.1
NetIC4_1: IC4.1 R4.1 | length 4.6
  Top Layer w0.254: IC4.1 78.305,27.318 82.321,27.318 82.327,27.311 R4.1@82.327,27.152
NetIC5_1: IC5.1 R7.1 | length 9.5
  Top Layer w0.254: R7.1 90.209,28.915 90.613,28.512 91.114,28.512 v1(91.2,28.426) ; IC5.1 92.866,24.493 93.133,24.227 93.133,23.772 92.872,23.512 v1(92.872,23.391)
  Bottom Layer w0.254: v1@91.356,28.417 92.128,27.645 92.415,27.645 93.101,26.959 93.101,25.35 92.872,25.121 v1(92.872,23.391)
NetIC6_1: IC6.1 R8.1 | length 12.5
  Top Layer w0.254: v1(88.725,24.164) 88.725,22.658 IC6.1
  Bottom Layer w0.254: v1(88.725,24.164) 88.725,23.403 90.456,21.672 90.456,21.454 90.645,21.265 90.863,21.265 90.891,21.237 90.919,21.265 93.352,21.265 94.178,22.09 R8.1@94.178,23.972
SCL: IC1.20 IC2.20 IC3.20 IC4.20 IC5.20 IC6.17 IC6.20 pad.2 R6.1 | length 135.8
  Top Layer w0.15: v1(11.371,23.362) 11.371,22.77 11.458,22.682 IC1.20 ; v1(13.839,30.604) 13.844,30.609 16.046,30.609 v1(16.051,30.613) ; IC2.20 14.654,24.032 14.838,23.847 14.838,23.422 v1(14.943,23.317)
  Top Layer w0.254: IC3.20 50.04,26.879 55.296,26.879 55.742,27.325 56.373,27.325 56.926,26.773 v1(58.645,26.773) ; v1(63.827,29.314) 64.498,28.644 64.498,28.347 65.582,27.263 68.212,27.263 v1(68.775,26.701) ; IC4.20 77.729,26.694 83.983,26.694 84.949,25.728 88.361,25.728 ; v1(82.451,30.789) 83.716,30.789 83.895,30.61 83.895,30.308 84.294,29.909 v1(84.294,29.788) ; v1@90.064,27.046 v1(89.943,27.046) 89.823,27.046 89.386,26.609 R6.1 88.561,25.928 88.361,25.728 ; IC6.20 89.441,23.142 89.441,24.649 88.361,25.728 ; v1(91.195,25.711) 91.258,25.711 91.567,25.401 IC5.20 92.266,24.125 92.198,24.057 92.198,22.78 91.93,22.513 IC6.17@91.93,21.747
  Bottom Layer w0.15: v1(11.371,23.362) 11.898,22.834 14.442,22.834 14.925,23.317 v1(14.943,23.317) 14.894,23.366 14.894,23.967 14.865,23.996 14.865,26.003 14.349,26.519 14.349,30.126 13.871,30.604 v1(13.839,30.604)
  Bottom Layer w0.254: v1(16.051,30.613) 19.653,30.613 19.984,30.282 31.874,30.282 33.348,28.808 36.043,28.808 36.709,29.474 39.791,29.474 40.337,30.019 44.542,30.019 ; pad.2 44.477,29.955 44.542,30.019 ; v1(58.645,26.773) 58.645,29.409 58.704,29.468 ; v1(63.827,29.314) 62.569,29.314 62.42,29.166 61.282,29.166 60.98,29.468 58.704,29.468 ; v1(68.775,26.701) 68.86,26.786 69.349,26.786 69.571,27.008 72.308,27.008 72.549,27.249 72.549,27.698 72.739,27.888 73.501,27.888 75.982,30.37 76.89,30.37 77.086,30.566 82.108,30.566 82.331,30.789 v1(82.451,30.789) ; v1(84.294,29.788) 85.54,29.788 85.887,30.136 87.012,30.136 89.024,28.123 89.024,27.965 v1(89.943,27.046) 89.943,27.039 91.195,25.787 v1(91.195,25.711) ; 44.542,30.019 56.537,30.019 57.089,29.468 58.704,29.468
SDA: IC1.19 IC2.19 IC3.19 IC4.19 IC5.17 IC5.19 IC6.19 pad.3 R5.1 | length 170.8
  Top Layer w0.15: v1@9.584,25.549 9.613,25.52 10.176,25.52 11.35,24.346 11.548,24.346 11.597,24.297 12.054,24.297 12.193,24.158 12.193,23.242 12.281,23.154 12.469,23.154 12.628,22.995 12.628,22.895 12.631,22.892 12.631,22.507 IC1.19 ; v1(9.601,25.61) 9.526,25.61 9.134,26.001 9.134,28.056 9.748,28.669 9.748,30.615 10.802,31.669 19.617,31.669 21.045,30.24 v1(21.045,29.516) ; v1(13.892,23.58) 13.892,23.728 14.154,23.99 IC2.19 IC2.19@14.161,24.709
  Top Layer w0.254: v1(28.785,29.389) 28.785,30.359 30.16,31.735 34.428,31.735 v1(35.75,30.412) ; v1@35.764,30.412 35.764,28.741 37.972,26.533 39.007,26.533 39.126,26.651 v1(40.282,26.651) ; IC3.19 49.442,27.227 49.442,26.669 49.683,26.428 55.677,26.428 55.9,26.651 v1(56.021,26.651) ; v1(63.824,28.205) 63.824,28.085 64.084,27.825 64.084,27.699 65.006,26.777 67.686,26.777 68.479,25.983 69.38,25.983 69.73,26.333 v1(69.851,26.333) ; IC4.19 76.965,27.207 76.965,26.649 77.425,26.189 83.85,26.189 85.015,25.025 v1(87.121,25.025) ; IC6.19 90.904,24.526 91.053,24.675 91.582,24.675 v1(91.59,24.683) ; v1(91.291,26.727) 91.412,26.727 91.586,26.901 IC5.17 ; v1@91.351,26.712 91.351,26.508 91.935,25.924 92.493,25.924 IC5.19
  Bottom Layer w0.15: v1(9.601,25.61) 9.75,25.61 9.911,25.771 12.975,25.771 14.189,24.557 14.189,24.026 13.892,23.728 v1(13.892,23.58)
  Bottom Layer w0.254: v1@21.045,29.448 28.725,29.448 v1(28.785,29.389) ; v1(35.75,30.412) 35.757,30.406 35.757,30.343 36.153,29.947 39.627,29.947 40.15,30.47 44.453,30.47 ; v1(40.282,26.651) 48.673,26.651 49.175,27.153 53.487,27.153 53.983,26.657 56.015,26.657 v1(56.021,26.651) ; pad.3 44.517,31.143 44.517,30.534 44.453,30.47 ; v1(63.824,28.205) 64.501,28.883 64.501,29.658 64.018,30.142 57.053,30.142 56.724,30.47 44.453,30.47 ; v1@69.852,26.334 72.589,26.334 76.17,29.916 77.078,29.916 77.274,30.112 82.796,30.112 83.13,30.446 83.644,30.446 ; R5.1 85.304,30.869 85.131,30.696 85.081,30.696 84.98,30.594 84.307,30.594 84.159,30.446 83.734,30.446 83.644,30.446 ; R5.1@85.374,30.849 85.444,30.919 87.144,30.919 91.987,26.076 91.987,25.055 91.616,24.683 v1(91.59,24.683) ; v1(87.121,25.025) 86.223,25.923 86.223,27.199 84.77,28.652 83.793,28.652 83.644,28.801 83.644,30.446 ; v1(91.291,26.727) v1@91.291,26.772
pads on no net: IC5.2 IC5.3 IC5.4 IC5.5 IC5.6 IC5.7 IC6.2 IC6.3 IC6.4

## Polygon pours and split planes (outlines as drawn)
+5 on Top Layer "+5_L01_P002" (solid, remove dead copper, pour order 2): 324 vertices, not listed, extent 2.6,0.006 102.4,34.393
GND on Bottom Layer "GND_L02_P003" (solid, remove dead copper, pour order 3): 324 vertices, not listed, extent 2.6,0.006 102.4,34.393

## Silkscreen, mask and mechanical layers (free items; w line width, h text height)
Mechanical 1:
  circle w0.013: c100,29.402 r1.5
  lines w0.013: 2.6,27.102 ccw(c4.1,27.102) 4.1,25.602 5,25.602 cw(c5,20.902) 9.7,20.902 9.7,2.5 ccw(c12.2,2.5) 12.2,0 16.55,0 16.55,24.65 cw(c17.55,24.65) 17.55,25.65 83.25,25.65 cw(c83.25,24.65) 84.25,24.65 84.25,0 92.8,0 ccw(c92.8,2.5) 95.3,2.5 95.3,20.902 cw(c100,20.902) 100,25.602 100.9,25.602 ccw(c100.9,27.102) 102.4,27.102 102.4,31.68 ccw(c100.9,31.68) 100.97,33.178 100.012,33.222 99.052,33.266 98.093,33.308 97.132,33.35 96.171,33.391 95.209,33.431 94.247,33.47 93.284,33.508 92.321,33.545 91.356,33.581 90.392,33.617 89.427,33.651 88.461,33.685 87.495,33.718 86.529,33.75 85.562,33.781 84.594,33.811 83.626,33.84 82.658,33.868 81.689,33.896 80.72,33.922 79.751,33.948 78.781,33.972 77.81,33.996 76.84,34.019 75.869,34.041 74.898,34.062 73.926,34.083 72.954,34.102 71.982,34.12 71.01,34.138 70.037,34.155 69.064,34.17 68.091,34.185 67.117,34.199 66.144,34.212 65.17,34.224 64.196,34.236 63.222,34.246 62.248,34.255 61.273,34.264 60.299,34.272 59.324,34.278 58.35,34.284 57.375,34.289 56.4,34.293 55.425,34.296 54.45,34.299 53.475,34.3 52.5,34.3 51.525,34.3 50.55,34.299 49.575,34.296 48.601,34.293 47.626,34.289 46.651,34.284 45.676,34.278 44.702,34.272 43.727,34.264 42.753,34.255 41.779,34.246 40.805,34.236 39.831,34.224 38.857,34.212 37.883,34.199 36.91,34.185 35.937,34.17 34.964,34.155 33.991,34.138 33.019,34.12 32.047,34.102 31.075,34.083 30.103,34.062 29.132,34.041 28.161,34.019 27.19,33.996 26.22,33.972 25.25,33.948 24.281,33.922 23.311,33.896 22.343,33.868 21.374,33.84 20.406,33.811 19.439,33.781 18.472,33.75 17.505,33.718 16.539,33.685 15.574,33.651 14.609,33.617 13.644,33.581 12.68,33.545 11.717,33.508 10.754,33.47 9.792,33.431 8.83,33.391 7.869,33.35 6.908,33.308 5.948,33.266 4.989,33.222 4.03,33.178 ccw(c4.1,31.68) 2.6,31.68 2.6,27.102